# Altium PCB AlcoholDetectieV2.PcbDoc
Units mil, origin at the board's own origin, x right, y up, seen from the top; angles counter-clockwise.
Board outline 1475 x 2745 mil, 2 copper layers (Top Layer, Bottom Layer); 28 components, 23 nets, 120 pads, 0 vias.
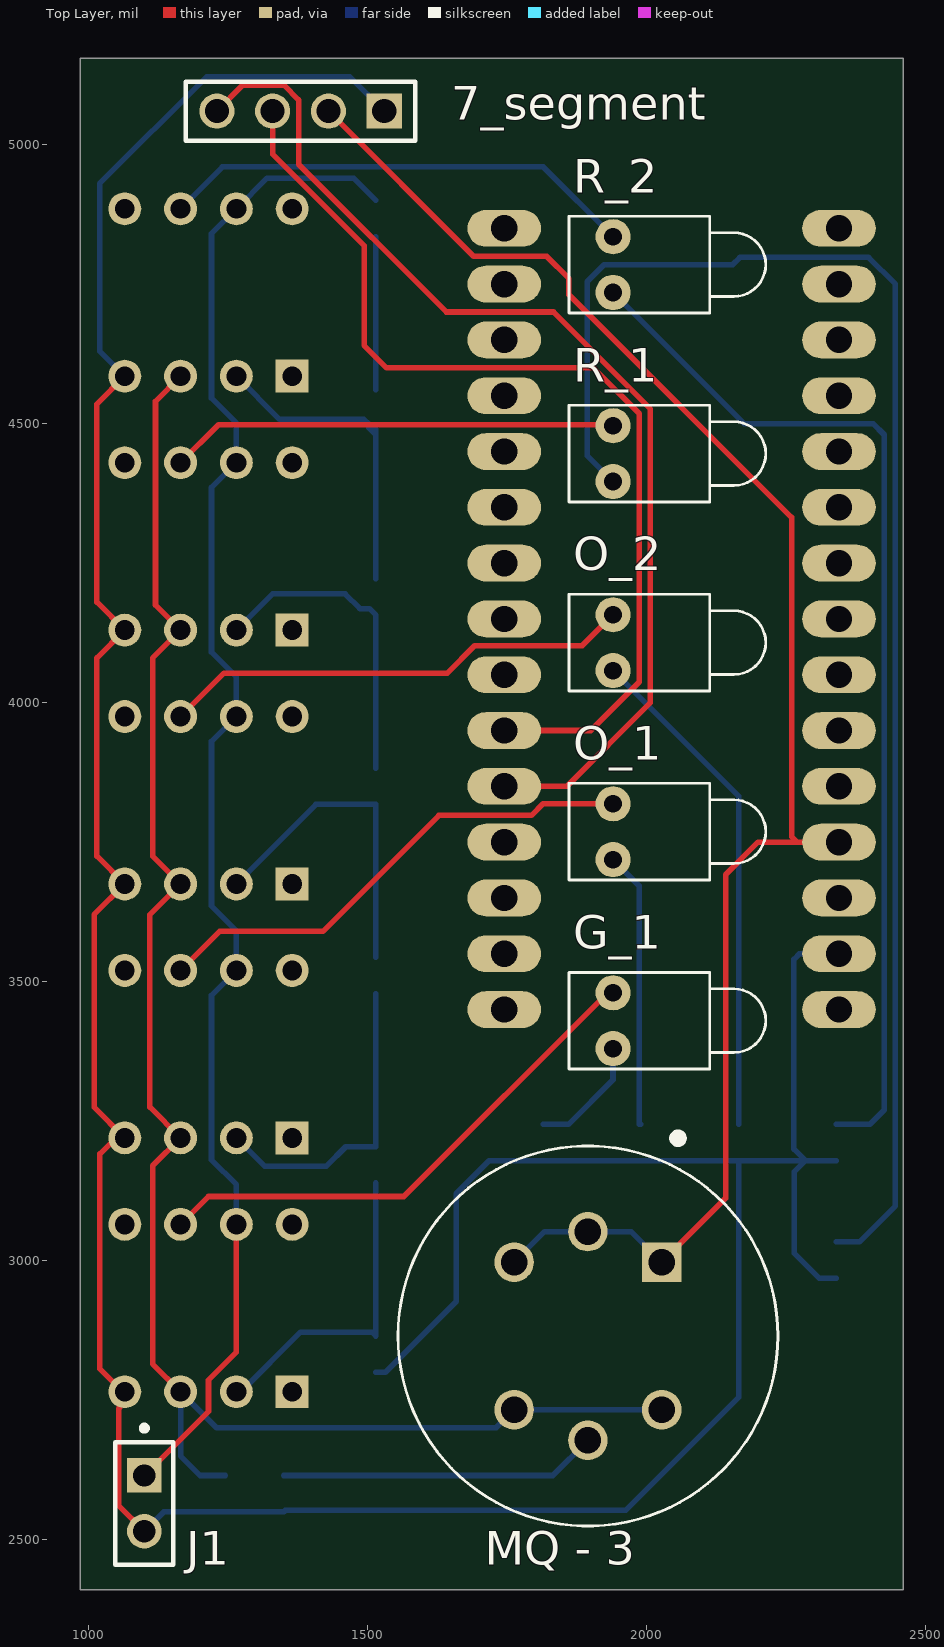
[diagram p0: Top Layer view]
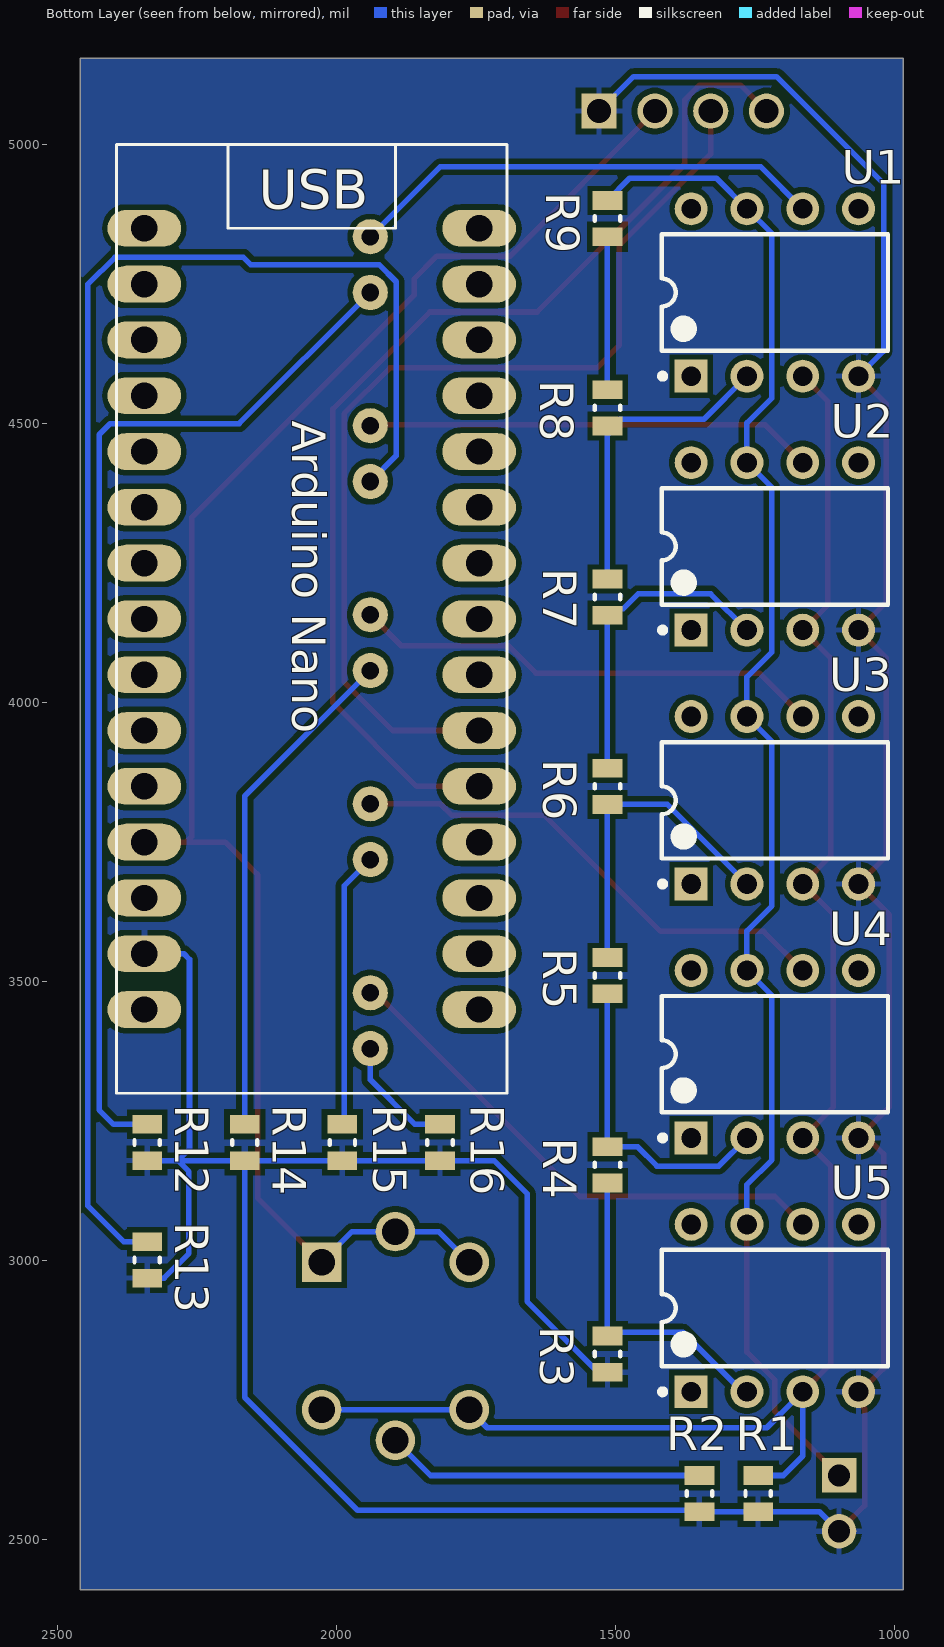
[diagram p1: Bottom Layer view, seen from below]

## Layer stack, top to bottom
Top Solder: solder mask 0.4, Solder Resist, Dk 3.5
Top Layer: signal copper 1.4
Dielectric 1: dielectric 12.6, FR-4, Dk 4.8
Bottom Layer: signal copper 1.4
Bottom Solder: solder mask 0.4, Solder Resist, Dk 3.5

## Board outline
985,2410 2460,2410 2460,5155 985,5155

## Design rules (kind name [scope] priority, off if disabled: settings)
Clearance [All] p1: gap=10 ignorepadtopadclearanceinfootprint=FALSE except(0: Arc-Hole Track-Hole SMDPad-Hole THPad-Hole Via-Hole Fill-Hole Poly-Hole Region-Hole Text-Hole)
PolygonConnect [All] p1: connectstyle=Relief reliefconductorwidth=10 reliefentries=4 polygonreliefangle="90 Angle" airgapwidth=10
RoutingVias [All] p1: holewidth=28 width=50 viastyle="Through Hole" minholewidth=28 minwidth=50 maxholewidth=28 maxwidth=50
SolderMaskExpansion [All] p1: expansion=4 istentingtop=FALSE
Width [All] p1: maxlimit=10 minlimit=10 preferedwidth=10
30 further rules are at their usual default settings.

## Components (designator, comment, footprint, x,y, rotation, side; value= is the part's Value field where it differs from the comment)
7_segment "61300411121" 61300411121 1380,5060 r180 top (schematic designator 7segment)
"Arduino Nano" "ARDUINONANO" PDIP-32 2045,5000 r180 bottom (schematic designator "ARDUINO NANO")
G_1 "LED1" LED-1 1940,3430 r0 top (schematic designator GROEN)
J1 "M20-9990246" FP-M20-9990246-MFG 1100,2565 r270 top
"MQ - 3" "SEN-08880" XDCR_SEN-08880 1895,2865 r270 top
O_1 "LED2" LED-1 1940,3768.75 r0 top (schematic designator ORANJE_1)
O_2 "LED3" LED-1 1940,4107.5 r0 top (schematic designator ORANJE_2)
R1 "1k Ω" RESC2013X50X30LL20T20 1245,2582.52 r90 bottom
R2 "5,1 Ω" RESC2013X50X30LL20T20 1350,2582.52 r90 bottom
R3 "1kΩ" RESC2013X50X30LL20T20 1515,2832.52 r90 bottom
R4 "1kΩ" RESC2013X50X30LL20T20 1515,3171.69 r90 bottom
R5 "1kΩ" RESC2013X50X30LL20T20 1515,3510.85 r90 bottom
R6 "1kΩ" RESC2013X50X30LL20T20 1515,3850.02 r90 bottom
R7 "1kΩ" RESC2013X50X30LL20T20 1515,4189.19 r90 bottom
R8 "10kΩ" RESC2013X50X30LL20T20 1515,4528.35 r90 bottom
R9 "300Ω" RESC2013X50X30LL20T20 1515,4867.52 r270 bottom
R12 "100Ω" RESC2013X50X30LL20T20 2340,3211.69 r90 bottom
R13 "100Ω" RESC2013X50X30LL20T20 2340,3001.12 r90 bottom
R14 "100Ω" RESC2013X50X30LL20T20 2165,3211.69 r90 bottom
R15 "100Ω" RESC2013X50X30LL20T20 1990,3211.69 r90 bottom
R16 "100Ω" RESC2013X50X30LL20T20 1815,3211.69 r90 bottom
R_1 "LED4" LED-1 1940,4446.25 r0 top (schematic designator ROOD_1)
R_2 "LED5" LED-1 1940,4785 r0 top (schematic designator ROOD_2)
U1 "LM741J" NAB0008A 1215,4735 r90 bottom
U2 "LM741J" NAB0008A 1215,4280 r90 bottom
U3 "LM741J" NAB0008A 1215,3825 r90 bottom
U4 "LM741J" NAB0008A 1215,3370 r90 bottom
U5 "LM741J" NAB0008A 1215,2915 r90 bottom

## Footprints (in the part's own frame and the unit in brackets; to place one, negate y for a bottom-side part, rotate by r counter-clockwise, add the part's x,y. Pads: shape width x height; smd on the part's side, far side on the other; paste and mask are expansions set on the pad)
61300411121 [mm] "Pin Header, pitch 2.54 mm, THT, Vertical, single row, 4p"
  rect 1.6x1.6 hole 1.1: 1(-3.81,0)
  round 1.6 hole 1.1: 2(-1.27,0) 3(1.27,0) 4(3.81,0)
  silkscreen extent -5.23,-1.34 5.23,1.34, body extent -5.08,-1.27 5.08,1.27, height 8.57
FP-M20-9990246-MFG [mm]
  rect 1.57x1.57 hole 1.02 paste-1000 mask+0: 1(-1.27,0)
  round 1.57 hole 1.02 paste-1000 mask+0: 2(1.27,0)
  silkscreen extent -3.55,-1.32 2.79,1.32, body extent -2.89,-1.42 2.89,1.42, height 0.25
LED-1 [mm] "LED; 2 Leads"
  round 1.6 hole 0.8: 1(0,1.27) 2(0,-1.27)
  silkscreen extent -2,-2.2 6.95,2.2
NAB0008A [mm] "DIP, 8-Leads, Body 9.78x6.73mm, Pitch 2.54mm, Row Spacing 7.62mm"
  rect 1.5x1.5 hole 0.9: 1(-3.81,3.81)
  round 1.5 hole 0.9: 2(-3.81,1.27) 3(-3.81,-1.27) 4(-3.81,-3.81) 5(3.81,-3.81) 6(3.81,-1.27) 7(3.81,1.27) 8(3.81,3.81)
  silkscreen extent -3.93,-5.15 2.65,5.24, body extent -3.6,-5.15 3.6,5.15, height 5.08
PDIP-32 [mil]
  oval 132x66 hole 47.24: 3V3(-300,-250) +5V(-300,-1250) A0(-300,-1150) A1(-300,-1050) A2(-300,-950) A3(-300,-850) A4(-300,-750) A5(-300,-650) A6(-300,-550) A7(-300,-450) AREF(-300,-350) D0/RX(300,-1450) D1/TX(300,-1550) D2(300,-1150) D3(300,-1050) D4(300,-950) D5(300,-850) D6(300,-750) D7(300,-650) D8(300,-550) D9(300,-450) D10(300,-350) D11(300,-250) D12(300,-150) D13(-300,-150) GND(300,-1250) GND1(-300,-1450) RESET(300,-1350) RESET1(-300,-1350) VIN(-300,-1550)
  silkscreen extent -350,-1700 350,0
RESC2013X50X30LL20T20 [mm] "Chip Resistor, 2-Leads, Body 2.00x1.25mm, IPC High Density"
  rect 0.85x1.35 smd: 1(-0.825,0) 2(0.825,0)
  silkscreen extent -0.1,-0.58 0.1,0.58, body extent -1.1,-0.72 1.1,0.72, height 0.5
XDCR_SEN-08880 [mm]
  rect 1.8x1.8 hole 1.2: 1(-3.359,3.359)
  round 1.8 hole 1.2: 2(-4.75,0) 3(-3.359,-3.359) 4(3.359,-3.359) 5(4.75,0) 6(3.359,3.359)
  silkscreen extent -9.2,-8.65 8.65,8.65

## Part data
7_segment: library part CMP-1502-01064-1, "THT Vertical Pin Header WR-PHD, Pitch 2.54 mm, Single Row, 4 pins", Contact Resistance=20mOhm, Manufacturer="Wurth Elektronik", Operating Temperature=-40to105degC, Rated Current=3A, Withstanding Voltage=500VAC, Working Voltage=250VAC, Datasheet URL=https://katalog.we-online.de/em/datasheet/6130xx11121.pdf, Gender=Male, Manufacturer URL=http://www.we-online.de, Mounting Technology=THT, Orientation=Vertical, Package Reference=61300411121, Packaging=Bag, Part Number=61300411121, Pin Number=4, Pitch=2.54mm, Publisher=WurthElektronik, Row Number=Single
"Arduino Nano": "Arduino; 20MHz; 3.3Ã·5VDC; Flash: 32kB; SRAM: 2kB; ATMEGA328,FT232R", Package=None, Availability="Not in stock", Check_prices=https://www.snapeda.com/parts/ARDUINONANO/Arduino/view-part/7459719/?ref=eda, MF=Arduino, MP=ARDUINONANO, Price=None, SnapEDA_Link=https://www.snapeda.com/parts/ARDUINONANO/Arduino/view-part/7459719/?ref=snap
G_1: "Typical RED GaAs LED", LatestRevisionDate=08-Jul-2005, LatestRevisionNote="Mech Layer 1 removed.", PackageDescription="LED; 2 Leads", PackageReference=LED-1, Published=8-Jun-2000, Publisher="Altium Limited"
J1: library part CMP-15831-000009-1, "CONN HEADER VERT 2POS 2.54MM", Current Rating=3A, Manufacturer=Harwin, Temperature="-40°C to +105°C", Temperature Range High=+105°C, Temperature Range Low=-40°C, Automotive=No, Category=Conn, ComponentLink2Description=Datasheet, ComponentLink2URL=https://cdn.harwin.com/pdfs/M20-999.pdf, Conn Gender=Male, Conn Orientation=Vertical, Contact Material=Tin,Nickel, Device Class L1=Connectors, Device Class L2="Headers and Wire Housings", Device Class L3=unset, Digikey Description="CONN HEADER VERT 2POS 2.54MM", Height=8.99mm, Lead Free=Yes, Manufacturer Part Number=M20-9990246, Mouser Description="2.54mm (0.1\") Pitch SIL Vertical PC Tail Pin Header, 6.1mm mating pin height, tin, 2 contacts", Number Of Contacts=2, Number Of Rows=1, Octopart=https://octopart.com/m20-9990246-harwin-2590635, Package=M20-9990246, Pitch=2.54mm, RoHS=TRUE
"MQ - 3": "Alcohol _C2H6O_ Sensor 0 V ~ 3.3 V", Package=None, Availability=Unavailable, MF="SparkFun Electronics", MP=SEN-08880, Price=None, SnapEDA_Link=https://www.snapeda.com/parts/SEN-08880/SparkFun%20Electronics/view-part/1160647/?ref=snap
O_1 O_2 R_1 R_2: library part LED1, "Typical RED GaAs LED", LatestRevisionDate=08-Jul-2005, LatestRevisionNote="Mech Layer 1 removed.", PackageDescription="LED; 2 Leads", PackageReference=LED-1, Published=8-Jun-2000, Publisher="Altium Limited"
R1 R2 R3 R4 R5 R6 R7 R8 R9 R12 R13 R14 R15 R16: library part CMP-2001-04896-1, Manufacturer="Vishay Dale", Part Number=CRCW08050000Z0EA
U1 U2 U3 U4 U5: library part CMP-0055-00160-3, "Operational Amplifier, 8-pin CerDIP", Manufacturer="Texas Instruments", Package Reference=NAB0008A, PackageTopMarking=NSUZXYTT*LM741J, PowerWise=N, ComponentLink1Description="Datasheet URL", ComponentLink1URL=http://www.ti.com/general/docs/lit/getliterature.tsp?genericPartNumber=LM741&fileType=pdf, CompType=Amplifiers, PackageDescription="Cerdip, .400 x .310in Body, 8 Lead, .300in Centers, .100in Pitch", PinCount=8, RoHS=N

## Nets (pads, with @x,y where several pads share a name; then routed paths per layer and width w, separated by ;. In a path a pad name is that pad's centre, name@x,y a point inside that pad or via, vN(x,y) a via of type N, cw(c..) or ccw(c..) an arc to the next point about the centre after c; other vN are vias at no path point)
+5: 7_segment.2 "Arduino Nano.+5V" "MQ - 3.1" "MQ - 3.2" "MQ - 3.3" | length 3088.8
  Top Layer w10: 7_segment.2 1690,4800 1821,4800 1861,4760 1861,4730.98 2260,4331.98 2260,3760 2270,3750 2345,3750 2200,3750 2142,3692 2142,3112 2027.23,2997.23
  Bottom Layer w10: 1762.77,2997.23 1817.54,3052.01 1895,3052.01 1972.48,3051.99 2027.23,2997.23
+15: J1.1 R9.1 U1.7 U2.7 U3.7 U4.7 U5.7 | length 2775.2
  Top Layer w10: J1.1 1215,2730 1215,2786 1265,2836 U5.7
  Bottom Layer w10: U5.7 1265,3136.1 1220.47,3180.62 1220.47,3475.47 U4.7 1265,3591.1 1220.47,3635.62 1220.47,3930.47 U3.7 1265,4046.1 1220.47,4090.62 1220.47,4385.47 U2.7 1265,4501.1 1220.47,4545.62 1220.47,4840.47 U1.7 1320,4940 1475,4940 R9.1
GND: 7_segment.1 "Arduino Nano.GND1" J1.2 R1.1 R2.1 R3.1 R12.1 R13.1 R14.1 R15.1 R16.1 U1.4 U2.4 U3.4 U4.4 U5.4 | length 6660.5
  Top Layer w10: U1.4 1015,4535 1015,4180 U2.4 1015,4080 1015,3725 U3.4 1010,3620 1010,3275 U4.4 1049.01,3220 1020.47,3191.46 1020,3191.46 1020,2806.61 1065,2761.61 U5.4 1055.61,2755.61 1055.61,2736.13 1054.09,2734.61 1054.09,2560.91 J1.2
  Bottom Layer w10: U1.4 1020,4630 1020,4930 1212,5122 1468,5122 7_segment.1 ; J1.2 1135.04,2550.04 R1.1 R2.1 1352.44,2552.48 1962.48,2552.48 2165,2755 R14.1 ; R3.1 1532,2800.04 1659,2927.04 1659,3120 1718.21,3179.21 R16.1 R15.1 R14.1 ; R13.1 2309.36,2968.64 2265,3013 2265,3159.41 2284.79,3179.21 ; R12.1 2284.79,3179.21 ; 2345,3550 2274,3550 2264,3540 2264,3200 2284.79,3179.21 ; R14.1 2284.79,3179.21
Net7segment_3: 7_segment.3 "Arduino Nano.D3" | length 1790.5
  Top Layer w10: 7_segment.3 1330,4983 1494,4819 1494,4640 1534,4600 1905,4600 1987,4518 1987,4037 1900,3950 1745,3950
Net7segment_4: 7_segment.4 "Arduino Nano.D2" | length 1954.5
  Top Layer w10: 7_segment.4 1276.5,5106.5 1350,5106.5 1376.5,5080 1376.5,4964.79 1641.29,4700 1833.29,4700 2007,4526.29 2007,4000 1857,3850 1745,3850
NetGROEN_1: G_1.1 U5.6 | length 951.9
  Top Layer w10: U5.6 1215,3115 1565,3115 1930,3480 G_1.1
  Bottom Layer w10: G_1.1@1935,3480 G_1.1
NetGROEN_2: G_1.2 R16.2 | length 214
  Bottom Layer w10: R16.2 1860,3244.17 1940,3324.17 G_1.2
"NetMQ - 3_4": "MQ - 3.4" "MQ - 3.6" R1.2 U1.3 U2.3 U3.3 U4.3 U5.3 | length 3098.5
  Top Layer w10: U5.3 1115,2815 1115,3170 U4.3 1110,3275 1110,3620 U3.3 1115,3725 1115,4080 U2.3 1120,4175 1120,4540 U1.3
  Bottom Layer w10: R1.2 1200,2615 1165,2650 U5.3 1175,2755 1174.39,2754.39 1177,2753 1229.53,2700.47 1730.47,2700.47 1762.77,2732.77 2027.23,2732.77
"NetMQ - 3_5": "MQ - 3.5" R2.2 | length 571.1
  Bottom Layer w10: R2.2 1832.01,2615 1895,2677.99
NetORANJE_1_1: O_1.1 U4.6 | length 898.7
  Top Layer w10: U4.6 1235,3590 1420,3590 1628,3798 1793.88,3798 1814.63,3818.75 O_1.1
NetORANJE_1_2: O_1.2 R15.2 | length 497.1
  Bottom Layer w10: O_1.2 1987,3671.75 1987,3244.17 R15.2
NetORANJE_2_1: O_2.1 U3.6 | length 850.6
  Top Layer w10: U3.6 1243,4053 1643,4053 1692,4102 1884.5,4102 O_2.1
NetORANJE_2_2: O_2.2 R14.2 | length 906.5
  Bottom Layer w10: O_2.2 2165,3832.5 R14.2
NetR3_2: R3.2 R4.1 U5.2 | length 571.4
  Bottom Layer w10: U5.2 1273.05,2765 1380,2871.95 1508.05,2871.95 R3.2 R4.1
NetR4_2: R4.2 R5.1 U4.2 | length 559.5
  Bottom Layer w10: U4.2 1315.53,3169.47 1426.3,3169.47 1461,3204.17 R4.2 R5.1
NetR5_2: R5.2 R6.1 U3.2 | length 583.2
  Bottom Layer w10: U3.2 1407.54,3817.54 R6.1 R5.2
NetR6_2: R6.2 R7.1 U2.2 | length 567
  Bottom Layer w10: U2.2 1330,4195 1460,4195 1486.56,4168.44 1503.27,4168.44 R7.1 R6.2
NetR7_2: R7.2 R8.1 U1.2 | length 571.2
  Bottom Layer w10: U1.2 1342.4,4507.6 1493.43,4507.6 1502.14,4498.89 1502.14,4492.86 R8.1@1515,4480 ; R7.2 R8.1@1515,4480 ; R8.1 R8.1@1515,4480
NetR8_2: R8.2 R9.2 | length 274.2
  Bottom Layer w10: R8.2 R9.2
NetR12_2: R12.2 R_2.2 | length 1898.2
  Bottom Layer w10: R_2.2 2175,4500 2406,4500 2426,4480 2426,3270.17 2400,3244.17 R12.2
NetR13_2: R13.2 R_1.2 | length 2752.4
  Bottom Layer w10: R_1.2 1893.5,4442.75 1893.5,4754.26 1924.24,4785 2154.56,4785 2167.56,4798 2397.88,4798 2446,4749.88 2446,3098.03 2381.57,3033.6 R13.2
NetROOD_1_1: R_1.1 U2.6 | length 803.9
  Top Layer w10: U2.6 1233,4498 1938.25,4498 R_1.1
NetROOD_2_1: R_2.1 U1.6 | length 857.8
  Bottom Layer w10: U1.6 1240,4960 1815,4960 R_2.1
pads on no net: "Arduino Nano.3V3" "Arduino Nano.A0" "Arduino Nano.A1" "Arduino Nano.A2" "Arduino Nano.A3" "Arduino Nano.A4" "Arduino Nano.A5" "Arduino Nano.A6" "Arduino Nano.A7" "Arduino Nano.AREF" "Arduino Nano.D0/RX" "Arduino Nano.D1/TX" "Arduino Nano.D4" "Arduino Nano.D5" "Arduino Nano.D6" "Arduino Nano.D7" "Arduino Nano.D8" "Arduino Nano.D9" "Arduino Nano.D10" "Arduino Nano.D11" "Arduino Nano.D12" "Arduino Nano.D13" "Arduino Nano.GND" "Arduino Nano.RESET1" "Arduino Nano.RESET" "Arduino Nano.VIN" U1.1 U1.5 U1.8 U2.1 U2.5 U2.8 U3.1 U3.5 U3.8 U4.1 U4.5 U4.8 U5.1 U5.5 U5.8

## Polygon pours and split planes (outlines as drawn)
GND on Bottom Layer "GND_L02_P000" (solid, pour order 0): 985,5155 2460,5155 2460,2410 985,2410

## Text inside footprints (layer, text, board x,y; h text height)
"Arduino Nano": Bottom Overlay "USB" at 2140,4885 h70